# Altium PCB STM 32 F4 Robusta V1.PcbDoc (part 6 of 7)
Units mm, origin at the board's own origin, x right, y up, seen from the top; angles counter-clockwise.
Board outline 287.78 x 230 mm, 2 copper layers (Top Layer, Bottom Layer); 54 components, 96 nets, 355 pads, 16 vias.
Unrouted connection lines stored in the file: 3.
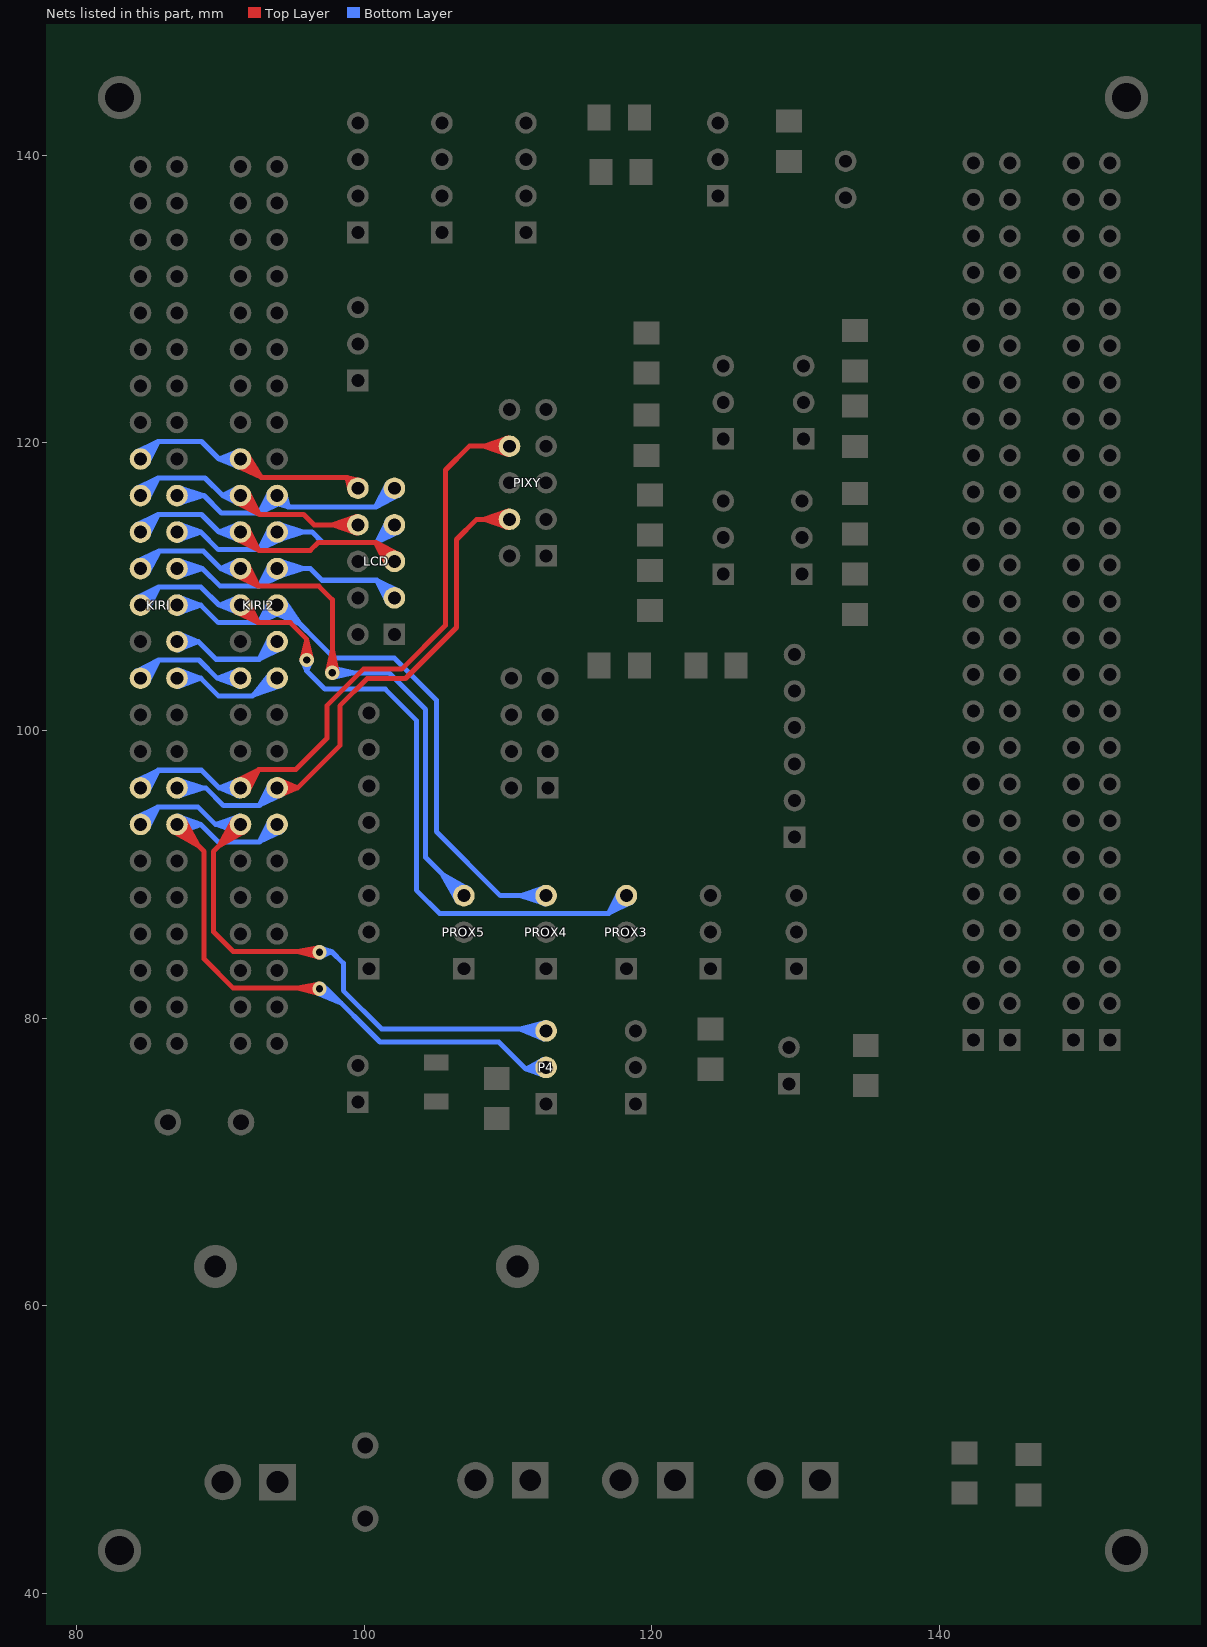
[diagram p6: the nets of this part, all layers, seen from the top]

## Via types
v1: diameter 1, hole 0.5, Top Layer to Bottom Layer, 13 vias
v2: diameter 0.8, hole 0.5, Top Layer to Bottom Layer, 3 vias

## Nets (pads, with @x,y where several pads share a name; then routed paths per layer and width w, separated by ;. In a path a pad name is that pad's centre, name@x,y a point inside that pad or via, vN(x,y) a via of type N, cw(c..) or ccw(c..) an arc to the next point about the centre after c; other vN are vias at no path point) (continued)
NetKIRI2_13: KIRI2.13 KIRI.13 P4.2 | length 150
  Top Layer w0.35: KIRI.13@86.648,93.014 88.487,91.98 ; KIRI.13@86.695,92.981 87.689,92.711 ; KIRI.13@86.742,92.956 87.756,92.778 ; KIRI.13@86.845,93.305 88.487,91.98 ; KIRI.13@86.846,93.303 87.689,92.711 ; KIRI.13@86.862,93.29 87.756,92.778 ; KIRI.13@86.995,92.897 cw(c86.995,91.509) 87.977,92.49 cw(c88.958,93.472) KIRI.13@87.57,93.472 ; KIRI.13@87.162,93.622 88.487,91.98 ; KIRI.13@87.164,93.621 87.756,92.778 ; KIRI.13@87.177,93.605 87.689,92.711 ; KIRI.13@87.453,93.819 88.487,91.98 ; KIRI.13@87.486,93.772 87.756,92.778 ; KIRI.13@87.511,93.725 87.689,92.711 ; 95.996,82.092 cw(c95.996,81.137) v1@96.671,81.812 ; 96.237,82.092 ccw(c96.237,82.706) v1@96.671,82.272 ; v1@96.756,81.751 96.396,82.113 ; v1@96.812,81.729 96.243,82.059 ; v1@96.829,82.359 96.243,82.059 ; v1@96.841,82.361 96.396,82.113 ; v1@96.857,81.72 95.349,82.092 ; v1@96.877,82.366 95.349,82.092 ; v1@96.901,82.092 90.903,82.092 88.885,84.11 88.885,91.582 KIRI.13@86.995,93.472 ; KIRI.13@86.995,93.472 87.689,92.711 ; KIRI.13@86.995,93.472 87.756,92.778 ; 95.349,82.092 v1(96.901,82.042) ; 96.243,82.059 v1(96.901,82.042) ; 96.396,82.113 v1(96.901,82.042)
  Bottom Layer w0.35: KIRI.13@87.009,93.247 88.024,93.425 ; KIRI.13@87.009,93.697 88.024,93.519 ; KIRI.13@87.01,93.248 88.646,93.472 ; KIRI.13@87.01,93.696 88.646,93.472 ; KIRI.13@87.03,93.25 88.024,93.519 ; KIRI.13@87.03,93.694 88.024,93.425 ; KIRI.13@87.095,92.906 88.646,93.472 ; KIRI.13@87.095,94.038 88.646,93.472 ; KIRI.13@87.13,92.913 88.024,93.425 ; KIRI.13@87.13,94.031 88.024,93.519 ; KIRI.13@87.181,92.928 88.024,93.519 ; KIRI.13@87.181,94.016 88.024,93.425 ; KIRI.13@87.402,93.065 cw(c88.383,92.084) 88.383,93.472 cw(c88.383,94.86) KIRI.13@87.402,93.879 ; KIRI2.13@93.375,93.477 cw(c91.987,93.477) 92.968,92.495 cw(c93.95,91.514) KIRI2.13@93.95,92.902 ; KIRI2.13@93.434,93.73 93.256,92.716 ; KIRI2.13@93.459,93.777 93.189,92.783 ; KIRI2.13@93.482,93.81 92.725,92.252 ; KIRI2.13@93.768,93.61 93.256,92.716 ; KIRI2.13@94.083,93.295 93.189,92.783 ; KIRI2.13@94.203,92.961 93.189,92.783 ; KIRI2.13@94.25,92.986 93.256,92.716 ; KIRI2.13@94.283,93.009 92.725,92.252 ; v1@96.52,82.092 96.851,82.092 v1(96.901,82.042) ; v1@96.746,81.756 98.418,81.033 ; v1@96.776,81.742 97.907,81.448 ; v1@96.901,81.717 cw(c96.901,79.706) 98.323,81.128 ; v1@96.901,82.067 cw(c96.901,80.901) 97.726,81.725 ; v1@96.919,81.717 97.484,81.911 ; v1@97.056,82.328 97.484,81.911 ; v1@97.196,81.906 cw(c97.409,81.808) 97.409,82.042 ; v1@97.196,82.178 ccw(c97.409,82.276) 97.409,82.042 ; 111.567,76.454 cw(c111.567,75.499) P4.2@112.242,76.174 ; P4.2@112.188,76.924 cw(c111.252,77.62) 111.252,76.454 ; P4.2@112.356,77.076 111.814,76.421 ; P4.2@112.454,77.122 111.714,76.55 ; P4.2@112.481,77.131 111.252,76.454 ; P4.2@112.491,76.028 111.714,76.55 ; P4.2@112.522,76.454 111.252,76.454 ; P4.2@112.559,76.013 111.814,76.421 ; P4.2@112.578,76.794 111.814,76.421 ; P4.2@112.583,76.01 111.252,76.454 ; P4.2@112.611,76.803 111.252,76.454 ; P4.2@112.614,76.803 111.714,76.55 ; P4.2@112.629,76.357 111.714,76.55 ; P4.2@112.651,76.356 111.252,76.454 ; P4.2@112.662,76.356 111.814,76.421 ; KIRI.13@86.995,93.472 88.024,93.519 ; KIRI.13@86.995,93.472 88.024,93.425 ; KIRI.13@86.995,93.472 88.646,93.472 ; 88.646,93.472 89.866,92.252 92.725,92.252 ; 92.725,92.252 KIRI2.13@93.95,93.477 ; 92.725,92.252 93.781,93.625 93.189,92.783 ; 92.725,92.252 94.098,93.308 93.256,92.716 ; 92.725,92.252 KIRI2.13@93.95,93.477 ; 93.189,92.783 KIRI2.13@93.95,93.477 ; 93.256,92.716 KIRI2.13@93.95,93.477 ; v1(96.901,82.042) 97.409,82.042 ; v1(96.901,82.042) 98.418,81.033 ; v1(96.901,82.042) 97.907,81.448 ; v1(96.901,82.042) 97.484,81.911 ; v1(96.901,82.042) 97.409,82.042 ; 97.409,82.042 97.005,81.734 97.409,82.042 ; 97.409,82.042 97.005,82.35 97.409,82.042 ; 97.409,82.042 101.107,78.344 109.362,78.344 111.252,76.454 ; 97.907,81.448 97.104,82.296 98.418,81.033 ; 111.252,76.454 P4.2@112.649,76.581 ; 111.714,76.55 P4.2@112.649,76.581 ; 111.814,76.421 P4.2@112.649,76.581
NetKIRI2_14: KIRI2.14 KIRI.14 P4.3 | length 145.7
  Top Layer w0.35: KIRI2.14@90.835,93.477 cw(c89.447,93.477) 90.428,92.495 cw(c91.41,91.514) KIRI2.14@91.41,92.902 ; KIRI2.14@90.894,93.73 90.716,92.716 ; KIRI2.14@90.919,93.777 90.649,92.783 ; KIRI2.14@90.952,93.824 89.918,91.985 ; KIRI2.14@91.228,93.61 90.716,92.716 ; KIRI2.14@91.241,93.626 90.649,92.783 ; KIRI2.14@91.243,93.627 89.918,91.985 ; KIRI2.14@91.543,93.295 90.649,92.783 ; KIRI2.14@91.559,93.308 90.716,92.716 ; KIRI2.14@91.56,93.31 89.918,91.985 ; KIRI2.14@91.663,92.961 90.649,92.783 ; KIRI2.14@91.71,92.986 90.716,92.716 ; KIRI2.14@91.757,93.019 89.918,91.985 ; 95.996,84.632 cw(c95.996,83.677) v1@96.671,84.352 ; 96.237,84.632 ccw(c96.237,85.246) v1@96.671,84.812 ; v1@96.52,84.632 90.903,84.632 89.535,86 89.535,91.602 KIRI2.14@91.41,93.477 ; v1@96.756,84.291 96.396,84.653 ; v1@96.812,84.269 96.243,84.599 ; v1@96.829,84.899 96.243,84.599 ; v1@96.841,84.901 96.396,84.653 ; v1@96.857,84.26 95.342,84.632 ; v1@96.878,84.906 95.342,84.632 ; 89.918,91.985 KIRI2.14@91.41,93.477 ; 90.649,92.783 KIRI2.14@91.41,93.477 ; 90.716,92.716 KIRI2.14@91.41,93.477 ; 95.342,84.632 v1(96.901,84.582) ; 96.243,84.599 v1(96.901,84.582) ; 96.396,84.653 v1(96.901,84.582)
  Bottom Layer w0.35: KIRI.14@84.122,93.94 85.68,94.697 ; KIRI.14@84.155,93.963 85.149,94.233 ; KIRI.14@84.202,93.988 85.216,94.166 ; KIRI.14@84.322,93.654 85.216,94.166 ; KIRI.14@84.455,94.047 ccw(c84.455,95.435) 85.437,94.454 ccw(c86.418,93.472) KIRI.14@85.03,93.472 ; KIRI.14@84.637,93.339 85.149,94.233 ; KIRI.14@84.923,93.139 85.68,94.697 ; KIRI.14@84.946,93.172 85.216,94.166 ; KIRI.14@84.971,93.219 85.149,94.233 ; KIRI2.14@91.003,93.07 ccw(c90.022,92.089) 90.022,93.477 ccw(c90.022,94.865) KIRI2.14@91.003,93.884 ; KIRI2.14@91.224,92.933 90.381,93.524 ; KIRI2.14@91.224,94.021 90.381,93.43 ; KIRI2.14@91.275,92.918 90.381,93.43 ; KIRI2.14@91.275,94.036 90.381,93.524 ; KIRI2.14@91.316,92.91 89.657,93.477 ; KIRI2.14@91.316,94.044 89.657,93.477 ; KIRI2.14@91.375,93.255 90.381,93.524 ; KIRI2.14@91.375,93.699 90.381,93.43 ; v1@96.52,84.632 97.74,84.632 ; v1@96.945,84.904 97.74,84.632 ; v1@96.961,84.901 97.406,84.653 ; v1@96.983,84.267 97.74,84.632 ; v1@96.985,84.896 97.49,84.592 ; v1@96.996,84.271 97.49,84.592 ; v1@97.046,84.291 97.406,84.653 ; v1@97.131,84.812 ccw(c97.565,85.246) 97.565,84.632 ; v1@97.143,84.365 cw(c97.74,83.831) 97.74,84.632 ; 110.954,79.248 cw(c110.954,77.426) P4.3@112.242,78.714 ; 111.567,79.248 ccw(c111.567,80.203) P4.3@112.242,79.528 ; 111.799,79.248 cw(c111.799,78.271) P4.3@112.49,78.962 ; P4.3@112.356,78.626 111.814,79.281 ; P4.3@112.485,78.57 111.426,79.186 ; P4.3@112.519,78.561 110.83,79.248 ; P4.3@112.522,78.994 112.268,79.248 101.219,79.248 98.552,81.915 98.552,83.82 97.74,84.632 ; P4.3@112.544,79.686 111.426,79.186 ; P4.3@112.559,79.689 111.814,79.281 ; P4.3@112.578,78.908 111.814,79.281 ; P4.3@112.598,79.694 110.83,79.248 ; P4.3@112.616,78.898 111.426,79.186 ; P4.3@112.62,78.898 110.83,79.248 ; P4.3@112.64,79.346 111.426,79.186 ; P4.3@112.651,79.346 110.83,79.248 ; P4.3@112.662,79.346 111.814,79.281 ; KIRI.14@84.455,93.472 85.216,94.166 ; KIRI.14@84.455,93.472 85.149,94.233 ; KIRI.14@84.455,93.472 85.68,94.697 ; 85.149,94.233 84.306,93.641 85.68,94.697 ; 85.216,94.166 84.624,93.323 85.68,94.697 ; 85.68,94.697 88.437,94.697 89.657,93.477 ; 89.657,93.477 KIRI2.14@91.41,93.477 ; 89.657,93.477 91.396,93.702 90.381,93.524 ; 89.657,93.477 91.396,93.252 90.381,93.43 ; 89.657,93.477 KIRI2.14@91.41,93.477 ; 90.381,93.43 KIRI2.14@91.41,93.477 ; 90.381,93.524 KIRI2.14@91.41,93.477 ; v1(96.901,84.582) 97.406,84.653 ; v1(96.901,84.582) 97.49,84.592 ; v1(96.901,84.582) 97.74,84.632 ; 110.83,79.248 P4.3@112.649,79.121 ; 111.426,79.186 P4.3@112.649,79.121 ; 111.814,79.281 P4.3@112.649,79.121
NetKIRI2_15: KIRI2.15 KIRI.15 PIXY.7 | length 115.8
  Top Layer w0.35: KIRI2.15@93.964,95.792 94.979,95.97 ; KIRI2.15@93.964,96.242 94.979,96.064 ; KIRI2.15@93.968,95.793 95.382,96.017 ; KIRI2.15@93.968,96.241 95.382,96.017 ; KIRI2.15@93.985,95.795 94.979,96.064 ; KIRI2.15@93.985,96.239 94.979,95.97 ; KIRI2.15@94.065,95.454 95.382,96.017 ; KIRI2.15@94.065,96.58 95.382,96.017 ; KIRI2.15@94.085,95.458 94.979,95.97 ; KIRI2.15@94.085,96.576 94.979,96.064 ; KIRI2.15@94.136,95.473 94.979,96.064 ; KIRI2.15@94.136,96.561 94.979,95.97 ; KIRI2.15@94.357,95.61 cw(c95.338,94.629) 95.338,96.017 cw(c95.338,97.405) KIRI2.15@94.357,96.424 ; PIXY.7@109.702,114.274 ccw(c108.721,113.293) 108.721,114.681 ccw(c108.721,116.069) PIXY.7@109.702,115.088 ; PIXY.7@109.923,114.137 109.08,114.728 ; PIXY.7@109.923,115.225 109.08,114.634 ; PIXY.7@109.974,114.122 109.08,114.634 ; PIXY.7@109.974,115.24 109.08,114.728 ; PIXY.7@110.017,114.113 108.309,114.681 ; PIXY.7@110.017,115.249 108.309,114.681 ; PIXY.7@110.074,114.459 109.08,114.728 ; PIXY.7@110.074,114.903 109.08,114.634 ; KIRI2.15@93.95,96.017 94.979,95.97 ; KIRI2.15@93.95,96.017 94.979,96.064 ; KIRI2.15@93.95,96.017 95.382,96.017 ; 95.382,96.017 98.313,98.948 98.313,101.712 100.218,103.617 102.885,103.617 106.426,107.158 106.426,113.284 107.823,114.681 PIXY.7@110.109,114.681 ; 108.309,114.681 110.095,114.906 109.08,114.728 ; 108.309,114.681 110.095,114.456 109.08,114.634 ; 109.08,114.634 PIXY.7@110.109,114.681 ; 109.08,114.728 PIXY.7@110.109,114.681
  Bottom Layer w0.35: KIRI.15@87.03,95.79 88.024,96.059 ; KIRI.15@87.03,96.234 88.024,95.965 ; KIRI.15@87.087,95.444 88.795,96.012 ; KIRI.15@87.087,96.58 88.795,96.012 ; KIRI.15@87.13,95.453 88.024,95.965 ; KIRI.15@87.13,96.571 88.024,96.059 ; KIRI.15@87.181,95.468 88.024,96.059 ; KIRI.15@87.181,96.556 88.024,95.965 ; KIRI.15@87.402,95.605 cw(c88.383,94.624) 88.383,96.012 cw(c88.383,97.4) KIRI.15@87.402,96.419 ; KIRI2.15@93.375,96.017 cw(c91.987,96.017) 92.968,95.035 cw(c93.95,94.054) KIRI2.15@93.95,95.442 ; KIRI2.15@93.434,96.27 93.256,95.256 ; KIRI2.15@93.459,96.317 93.189,95.323 ; KIRI2.15@93.482,96.35 92.725,94.792 ; KIRI2.15@93.768,96.15 93.256,95.256 ; KIRI2.15@94.083,95.835 93.189,95.323 ; KIRI2.15@94.203,95.501 93.189,95.323 ; KIRI2.15@94.25,95.526 93.256,95.256 ; KIRI2.15@94.283,95.549 92.725,94.792 ; KIRI.15@86.995,96.012 88.024,95.965 ; KIRI.15@86.995,96.012 88.024,96.059 ; KIRI.15@86.995,96.012 88.997,96.012 90.217,94.792 92.725,94.792 ; 88.024,95.965 87.009,95.787 88.795,96.012 ; 88.024,96.059 87.009,96.237 88.795,96.012 ; 92.725,94.792 KIRI2.15@93.95,96.017 ; 92.725,94.792 93.781,96.165 93.189,95.323 ; 92.725,94.792 94.098,95.848 93.256,95.256 ; 92.725,94.792 KIRI2.15@93.95,96.017 ; 93.189,95.323 KIRI2.15@93.95,96.017 ; 93.256,95.256 KIRI2.15@93.95,96.017
NetKIRI2_16: KIRI2.16 KIRI.16 PIXY.3 | length 122.9
  Top Layer w0.35: KIRI2.16@91.074,96.484 92.675,97.282 ; KIRI2.16@91.11,96.508 92.104,96.778 ; KIRI2.16@91.156,96.533 92.171,96.711 ; KIRI2.16@91.277,96.199 92.171,96.711 ; KIRI2.16@91.41,96.592 ccw(c91.41,97.98) 92.392,96.999 ccw(c93.373,96.017) KIRI2.16@91.985,96.017 ; KIRI2.16@91.592,95.884 92.104,96.778 ; KIRI2.16@91.877,95.681 92.675,97.282 ; KIRI2.16@91.901,95.717 92.171,96.711 ; KIRI2.16@91.926,95.763 92.104,96.778 ; PIXY.3@109.702,119.354 ccw(c108.721,118.373) 108.721,119.761 ccw(c108.721,121.149) PIXY.3@109.702,120.168 ; PIXY.3@109.923,119.217 109.08,119.808 ; PIXY.3@109.923,120.305 109.08,119.714 ; PIXY.3@109.974,119.202 109.08,119.714 ; PIXY.3@109.974,120.32 109.08,119.808 ; PIXY.3@110.017,119.193 108.309,119.761 ; PIXY.3@110.017,120.329 108.309,119.761 ; PIXY.3@110.074,119.539 109.08,119.808 ; PIXY.3@110.074,119.983 109.08,119.714 ; KIRI2.16@91.41,96.017 92.104,96.778 ; KIRI2.16@91.41,96.017 92.171,96.711 ; KIRI2.16@91.41,96.017 92.675,97.282 ; 92.104,96.778 91.261,96.186 92.675,97.282 ; 92.171,96.711 91.579,95.868 92.675,97.282 ; 92.675,97.282 95.25,97.282 97.409,99.441 97.409,101.727 99.949,104.267 102.616,104.267 105.664,107.315 105.664,118.11 107.315,119.761 PIXY.3@110.109,119.761 ; 108.309,119.761 110.095,119.986 109.08,119.808 ; 108.309,119.761 110.095,119.536 109.08,119.714 ; 109.08,119.714 PIXY.3@110.109,119.761 ; 109.08,119.808 PIXY.3@110.109,119.761
  Bottom Layer w0.35: KIRI.16@84.122,96.48 85.68,97.237 ; KIRI.16@84.155,96.503 85.149,96.773 ; KIRI.16@84.202,96.528 85.216,96.706 ; KIRI.16@84.322,96.194 85.216,96.706 ; KIRI.16@84.455,96.587 ccw(c84.455,97.975) 85.437,96.994 ccw(c86.418,96.012) KIRI.16@85.03,96.012 ; KIRI.16@84.637,95.879 85.149,96.773 ; KIRI.16@84.923,95.679 85.68,97.237 ; KIRI.16@84.946,95.712 85.216,96.706 ; KIRI.16@84.971,95.759 85.149,96.773 ; KIRI2.16@91.003,95.61 ccw(c90.022,94.629) 90.022,96.017 ccw(c90.022,97.405) KIRI2.16@91.003,96.424 ; KIRI2.16@91.224,95.473 90.381,96.064 ; KIRI2.16@91.224,96.561 90.381,95.97 ; KIRI2.16@91.275,95.458 90.381,95.97 ; KIRI2.16@91.275,96.576 90.381,96.064 ; KIRI2.16@91.3,95.453 89.911,96.017 ; KIRI2.16@91.3,96.581 89.911,96.017 ; KIRI2.16@91.375,95.795 90.381,96.064 ; KIRI2.16@91.375,96.239 90.381,95.97 ; KIRI2.16@91.393,95.793 89.911,96.017 ; KIRI2.16@91.393,96.241 89.911,96.017 ; KIRI2.16@91.396,95.792 90.381,95.97 ; KIRI2.16@91.396,96.242 90.381,96.064 ; KIRI.16@84.455,96.012 85.149,96.773 ; KIRI.16@84.455,96.012 85.216,96.706 ; KIRI.16@84.455,96.012 85.68,97.237 ; 85.149,96.773 84.306,96.181 85.68,97.237 ; 85.216,96.706 84.624,95.863 85.68,97.237 ; 85.68,97.237 88.691,97.237 89.911,96.017 ; 89.911,96.017 KIRI2.16@91.41,96.017 ; 89.911,96.017 KIRI2.16@91.41,96.017 ; 90.381,95.97 KIRI2.16@91.41,96.017 ; 90.381,96.064 KIRI2.16@91.41,96.017
NetKIRI2_21: KIRI2.21 KIRI.21 | length 51.6
  Bottom Layer w0.35: KIRI.21@87.009,103.407 88.024,103.585 ; KIRI.21@87.009,103.857 88.024,103.679 ; KIRI.21@87.01,103.408 88.646,103.632 ; KIRI.21@87.01,103.856 88.646,103.632 ; KIRI.21@87.03,103.41 88.024,103.679 ; KIRI.21@87.03,103.854 88.024,103.585 ; KIRI.21@87.095,103.066 88.646,103.632 ; KIRI.21@87.095,104.198 88.646,103.632 ; KIRI.21@87.13,103.073 88.024,103.585 ; KIRI.21@87.13,104.191 88.024,103.679 ; KIRI.21@87.181,103.088 88.024,103.679 ; KIRI.21@87.181,104.176 88.024,103.585 ; KIRI.21@87.402,103.225 cw(c88.383,102.244) 88.383,103.632 cw(c88.383,105.02) KIRI.21@87.402,104.039 ; 92.814,102.974 cw(c93.875,101.914) KIRI2.21@93.94,103.412 ; KIRI2.21@93.527,104.027 92.799,102.813 ; KIRI2.21@93.532,104.032 93.182,103.244 ; KIRI2.21@93.553,104.053 92.305,102.465 ; KIRI2.21@93.805,103.809 92.799,102.813 ; KIRI2.21@93.809,103.813 92.305,102.465 ; KIRI2.21@93.822,103.822 93.182,103.244 ; KIRI2.21@93.925,103.063 ccw(c93.828,100.837) 92.252,102.412 ; KIRI2.21@94.026,103.067 93.182,103.244 ; KIRI2.21@94.025,103.425 93.182,103.244 ; KIRI2.21@94.066,103.444 92.799,102.813 ; KIRI2.21@94.07,103.447 92.305,102.465 ; KIRI2.21@94.183,103.111 92.799,102.813 ; KIRI2.21@94.214,103.126 92.305,102.465 ; KIRI.21@86.995,103.632 88.024,103.679 ; KIRI.21@86.995,103.632 88.024,103.585 ; KIRI.21@86.995,103.632 88.646,103.632 ; 88.646,103.632 89.866,102.412 92.252,102.412 ; 92.252,102.412 93.477,103.637 KIRI2.21@93.95,103.637 ; 92.305,102.465 KIRI2.21@93.95,103.637 ; 92.799,102.813 KIRI2.21@93.95,103.637 ; 93.182,103.244 KIRI2.21@93.95,103.637
NetKIRI2_22: KIRI2.22 KIRI.22 | length 48.3
  Bottom Layer w0.35: KIRI.22@84.119,104.098 85.725,104.902 ; KIRI.22@84.155,104.123 85.149,104.393 ; KIRI.22@84.202,104.148 85.216,104.326 ; KIRI.22@84.322,103.814 85.216,104.326 ; KIRI.22@84.455,104.207 ccw(c84.455,105.595) 85.437,104.614 ccw(c86.418,103.632) KIRI.22@85.03,103.632 ; KIRI.22@84.637,103.499 85.149,104.393 ; KIRI.22@84.921,103.296 85.725,104.902 ; KIRI.22@84.946,103.332 85.216,104.326 ; KIRI.22@84.971,103.379 85.149,104.393 ; KIRI2.22@91.003,103.23 ccw(c90.022,102.249) 90.022,103.637 ccw(c90.022,105.025) KIRI2.22@91.003,104.044 ; KIRI2.22@91.224,103.093 90.381,103.684 ; KIRI2.22@91.224,104.181 90.381,103.59 ; KIRI2.22@91.275,103.078 90.381,103.59 ; KIRI2.22@91.275,104.196 90.381,103.684 ; KIRI2.22@91.308,103.071 89.784,103.637 ; KIRI2.22@91.308,104.203 89.784,103.637 ; KIRI2.22@91.375,103.415 90.381,103.684 ; KIRI2.22@91.375,103.859 90.381,103.59 ; KIRI2.22@91.394,103.413 89.784,103.637 ; KIRI2.22@91.394,103.861 89.784,103.637 ; KIRI2.22@91.396,103.412 90.381,103.59 ; KIRI2.22@91.396,103.862 90.381,103.684 ; KIRI.22@84.455,103.632 85.216,104.326 ; KIRI.22@84.455,103.632 85.149,104.393 ; KIRI.22@84.455,103.632 85.725,104.902 ; 85.149,104.393 84.306,103.801 85.725,104.902 ; 85.216,104.326 84.624,103.483 85.725,104.902 ; 85.725,104.902 88.519,104.902 89.784,103.637 ; 89.784,103.637 KIRI2.22@91.41,103.637 ; 89.784,103.637 KIRI2.22@91.41,103.637 ; 90.381,103.59 KIRI2.22@91.41,103.637 ; 90.381,103.684 KIRI2.22@91.41,103.637
NetKIRI2_23: KIRI2.23 KIRI.23 | length 47.6
  Bottom Layer w0.35: KIRI.23@87.009,105.947 88.024,106.125 ; KIRI.23@87.009,106.397 88.024,106.219 ; KIRI.23@87.012,105.948 88.489,106.172 ; KIRI.23@87.012,106.396 88.489,106.172 ; KIRI.23@87.03,105.95 88.024,106.219 ; KIRI.23@87.03,106.394 88.024,106.125 ; KIRI.23@87.106,105.608 88.489,106.172 ; KIRI.23@87.106,106.736 88.489,106.172 ; KIRI.23@87.13,105.613 88.024,106.125 ; KIRI.23@87.13,106.731 88.024,106.219 ; KIRI.23@87.181,105.628 88.024,106.219 ; KIRI.23@87.181,106.716 88.024,106.125 ; KIRI.23@87.402,105.765 cw(c88.383,104.784) 88.383,106.172 cw(c88.383,107.56) KIRI.23@87.402,106.579 ; KIRI2.23@93.375,106.177 cw(c91.987,106.177) 92.968,105.195 cw(c93.95,104.214) KIRI2.23@93.95,105.602 ; KIRI2.23@93.434,106.43 93.256,105.416 ; KIRI2.23@93.459,106.477 93.189,105.483 ; KIRI2.23@93.482,106.51 92.725,104.952 ; KIRI2.23@93.768,106.31 93.256,105.416 ; KIRI2.23@94.083,105.995 93.189,105.483 ; KIRI2.23@94.203,105.661 93.189,105.483 ; KIRI2.23@94.25,105.686 93.256,105.416 ; KIRI2.23@94.283,105.709 92.725,104.952 ; KIRI.23@86.995,106.172 88.024,106.125 ; KIRI.23@86.995,106.172 88.024,106.219 ; KIRI.23@86.995,106.172 88.489,106.172 ; 88.489,106.172 89.709,104.952 92.725,104.952 ; 92.725,104.952 KIRI2.23@93.95,106.177 ; 92.725,104.952 93.781,106.325 93.189,105.483 ; 92.725,104.952 94.098,106.008 93.256,105.416 ; 92.725,104.952 KIRI2.23@93.95,106.177 ; 93.189,105.483 KIRI2.23@93.95,106.177 ; 93.256,105.416 KIRI2.23@93.95,106.177
NetKIRI2_25: KIRI2.25 KIRI.25 PROX4.3 | length 120.6
  Bottom Layer w0.35: KIRI.25@87.009,108.487 88.024,108.665 ; KIRI.25@87.009,108.937 88.024,108.759 ; KIRI.25@87.01,108.488 88.646,108.712 ; KIRI.25@87.01,108.936 88.646,108.712 ; KIRI.25@87.03,108.49 88.024,108.759 ; KIRI.25@87.03,108.934 88.024,108.665 ; KIRI.25@87.095,108.146 88.646,108.712 ; KIRI.25@87.095,109.278 88.646,108.712 ; KIRI.25@87.13,108.153 88.024,108.665 ; KIRI.25@87.13,109.271 88.024,108.759 ; KIRI.25@87.181,108.168 88.024,108.759 ; KIRI.25@87.181,109.256 88.024,108.665 ; KIRI.25@87.402,108.305 cw(c88.383,107.324) 88.383,108.712 cw(c88.383,110.1) KIRI.25@87.402,109.119 ; KIRI2.25@93.375,108.717 cw(c91.987,108.717) 92.968,107.735 cw(c93.95,106.754) 93.95,108.142 cw(c93.95,106.08) 95.408,107.538 ; KIRI2.25@93.434,108.97 93.256,107.956 ; KIRI2.25@93.459,109.017 93.189,108.023 ; KIRI2.25@93.482,109.05 92.725,107.492 ; KIRI2.25@93.648,108.228 95.566,107.38 ; KIRI2.25@93.688,108.205 94.981,107.866 ; KIRI2.25@93.768,108.85 93.256,107.956 ; KIRI2.25@93.816,108.536 95.566,107.38 ; KIRI2.25@93.822,108.532 94.981,107.866 ; KIRI2.25@93.95,108.492 cw(c93.95,107.275) 94.81,108.136 ; KIRI2.25@94.083,108.535 93.189,108.023 ; KIRI2.25@94.102,108.882 95.566,107.38 ; KIRI2.25@94.107,108.878 94.981,107.866 ; KIRI2.25@94.203,108.201 93.189,108.023 ; KIRI2.25@94.25,108.226 93.256,107.956 ; KIRI2.25@94.283,108.249 92.725,107.492 ; KIRI2.25@94.374,109.106 95.566,107.38 ; KIRI2.25@94.403,109.071 94.981,107.866 ; KIRI2.25@94.525,108.717 ccw(c95.239,108.717) 94.734,108.212 ; PROX4.3@112.242,88.112 ccw(c111.261,87.131) 111.261,88.519 ccw(c111.261,89.907) PROX4.3@112.242,88.926 ; PROX4.3@112.463,87.975 111.62,88.566 ; PROX4.3@112.463,89.063 111.62,88.472 ; PROX4.3@112.514,87.96 111.62,88.472 ; PROX4.3@112.514,89.078 111.62,88.566 ; PROX4.3@112.557,87.951 110.849,88.519 ; PROX4.3@112.557,89.087 110.849,88.519 ; PROX4.3@112.614,88.297 111.62,88.566 ; PROX4.3@112.614,88.741 111.62,88.472 ; KIRI.25@86.995,108.712 88.024,108.759 ; KIRI.25@86.995,108.712 88.024,108.665 ; KIRI.25@86.995,108.712 88.646,108.712 ; 88.646,108.712 89.866,107.492 92.725,107.492 ; 92.725,107.492 KIRI2.25@93.95,108.717 ; 92.725,107.492 93.781,108.865 93.189,108.023 ; 92.725,107.492 94.098,108.548 93.256,107.956 ; 92.725,107.492 KIRI2.25@93.95,108.717 ; 93.189,108.023 KIRI2.25@93.95,108.717 ; 93.256,107.956 KIRI2.25@93.95,108.717 ; KIRI2.25@93.95,108.717 95.566,107.38 ; KIRI2.25@93.95,108.717 94.981,107.866 ; KIRI2.25@93.95,108.717 94.229,108.717 97.917,105.029 102.108,105.029 105.029,102.108 105.029,92.964 109.474,88.519 PROX4.3@112.649,88.519 ; 110.849,88.519 112.635,88.744 111.62,88.566 ; 110.849,88.519 112.635,88.294 111.62,88.472 ; 111.62,88.472 PROX4.3@112.649,88.519 ; 111.62,88.566 PROX4.3@112.649,88.519
NetKIRI2_26: KIRI2.26 KIRI.26 PROX3.3 | length 147
  Top Layer w0.35: KIRI2.26@91.077,108.249 92.635,107.492 ; KIRI2.26@91.11,108.226 92.104,107.956 ; KIRI2.26@91.156,108.201 92.171,108.023 ; KIRI2.26@91.277,108.535 92.171,108.023 ; KIRI2.26@91.41,108.142 cw(c91.41,106.754) 92.392,107.735 cw(c93.373,108.717) KIRI2.26@91.985,108.717 ; KIRI2.26@91.579,108.866 92.171,108.023 ; KIRI2.26@91.579,108.865 92.635,107.492 ; KIRI2.26@91.592,108.85 92.104,107.956 ; KIRI2.26@91.878,109.05 92.635,107.492 ; KIRI2.26@91.901,109.017 92.171,108.023 ; KIRI2.26@91.926,108.97 92.104,107.956 ; v1@95.689,104.939 96.012,106.345 ; v1@95.696,104.978 95.985,105.484 ; v1@95.704,105.007 96.039,105.484 ; v1@95.782,105.132 ccw(c95.227,105.687) 96.012,105.687 ccw(c96.797,105.687) v1@96.242,105.132 ; v1@96.32,105.007 95.985,105.484 ; v1@96.328,104.978 96.039,105.484 ; v1@96.335,104.939 96.012,106.345 ; KIRI2.26@91.41,108.717 92.104,107.956 ; KIRI2.26@91.41,108.717 92.171,108.023 ; KIRI2.26@91.41,108.717 92.635,107.492 ; 92.104,107.956 91.261,108.548 92.635,107.492 ; 92.635,107.492 94.865,107.492 96.012,106.345 ; 95.985,105.484 v1(96.012,104.902) ; v1(96.012,104.902) 96.039,105.484 ; v1(96.012,104.902) 96.012,106.345
  Bottom Layer w0.35: KIRI.26@84.119,109.178 85.725,109.982 ; KIRI.26@84.155,109.203 85.149,109.473 ; KIRI.26@84.202,109.228 85.216,109.406 ; KIRI.26@84.322,108.894 85.216,109.406 ; KIRI.26@84.455,109.287 ccw(c84.455,110.675) 85.437,109.694 ccw(c86.418,108.712) KIRI.26@85.03,108.712 ; KIRI.26@84.637,108.579 85.149,109.473 ; KIRI.26@84.921,108.376 85.725,109.982 ; KIRI.26@84.946,108.412 85.216,109.406 ; KIRI.26@84.971,108.459 85.149,109.473 ; KIRI2.26@91.003,108.31 ccw(c90.022,107.329) 90.022,108.717 ccw(c90.022,110.105) KIRI2.26@91.003,109.124 ; KIRI2.26@91.224,108.173 90.381,108.764 ; KIRI2.26@91.224,109.261 90.381,108.67 ; KIRI2.26@91.275,108.158 90.381,108.67 ; KIRI2.26@91.275,109.276 90.381,108.764 ; KIRI2.26@91.3,108.153 89.911,108.717 ; KIRI2.26@91.3,109.281 89.911,108.717 ; KIRI2.26@91.375,108.495 90.381,108.764 ; KIRI2.26@91.375,108.939 90.381,108.67 ; KIRI2.26@91.393,108.493 89.911,108.717 ; KIRI2.26@91.393,108.941 89.911,108.717 ; KIRI2.26@91.396,108.492 90.381,108.67 ; KIRI2.26@91.396,108.942 90.381,108.764 ; v1@95.694,104.833 96.012,104.14 ; v1@95.697,104.824 95.983,104.344 ; v1@95.706,104.791 96.041,104.344 ; v1@95.787,104.667 cw(c95.281,104.14) 96.012,104.14 ; v1@96.237,104.667 ccw(c96.743,104.14) 96.012,104.14 ; v1@96.318,104.791 95.983,104.344 ; v1@96.327,104.824 96.041,104.344 ; v1@96.33,104.833 96.012,104.14 ; PROX3.3@117.662,88.519 cw(c116.274,88.519) 117.255,87.537 cw(c118.237,86.556) PROX3.3@118.237,87.944 ; PROX3.3@117.721,88.772 117.543,87.758 ; PROX3.3@117.746,88.819 117.476,87.825 ; PROX3.3@117.769,88.852 117.012,87.294 ; PROX3.3@118.055,88.652 117.543,87.758 ; PROX3.3@118.37,88.337 117.476,87.825 ; PROX3.3@118.49,88.003 117.476,87.825 ; PROX3.3@118.537,88.028 117.543,87.758 ; PROX3.3@118.57,88.051 117.012,87.294 ; KIRI.26@84.455,108.712 85.149,109.473 ; KIRI.26@84.455,108.712 85.216,109.406 ; KIRI.26@84.455,108.712 85.725,109.982 ; 85.149,109.473 84.306,108.881 85.725,109.982 ; 85.216,109.406 84.624,108.563 85.725,109.982 ; 85.725,109.982 88.646,109.982 89.911,108.717 ; 89.911,108.717 KIRI2.26@91.41,108.717 ; 89.911,108.717 KIRI2.26@91.41,108.717 ; 90.381,108.67 KIRI2.26@91.41,108.717 ; 90.381,108.764 KIRI2.26@91.41,108.717 ; 95.983,104.344 v1(96.012,104.902) ; 96.012,104.14 v1(96.012,104.902) ; 96.012,104.14 v1(96.012,104.902) ; 96.012,104.14 97.282,102.87 101.473,102.87 103.632,100.711 103.632,88.9 105.238,87.294 117.012,87.294 ; v1(96.012,104.902) 96.041,104.344 ; 117.012,87.294 PROX3.3@118.237,88.519 ; 117.012,87.294 118.068,88.667 117.476,87.825 ; 117.012,87.294 118.385,88.35 117.543,87.758 ; 117.012,87.294 PROX3.3@118.237,88.519 ; 117.476,87.825 PROX3.3@118.237,88.519 ; 117.543,87.758 PROX3.3@118.237,88.519
NetKIRI2_27: KIRI2.27 KIRI.27 LCD.3 | length 98.5
  Bottom Layer w0.35: KIRI.27@87.03,111.03 88.024,111.299 ; KIRI.27@87.03,111.474 88.024,111.205 ; KIRI.27@87.088,110.685 88.773,111.252 ; KIRI.27@87.088,111.819 88.773,111.252 ; KIRI.27@87.13,110.693 88.024,111.205 ; KIRI.27@87.13,111.811 88.024,111.299 ; KIRI.27@87.181,110.708 88.024,111.299 ; KIRI.27@87.181,111.796 88.024,111.205 ; KIRI.27@87.402,110.845 cw(c88.383,109.864) 88.383,111.252 cw(c88.383,112.64) KIRI.27@87.402,111.659 ; KIRI2.27@93.375,111.257 cw(c91.987,111.257) 92.968,110.275 cw(c93.95,109.294) KIRI2.27@93.95,110.682 ; KIRI2.27@93.434,111.51 93.256,110.496 ; KIRI2.27@93.459,111.557 93.189,110.563 ; KIRI2.27@93.482,111.59 92.725,110.032 ; KIRI2.27@93.768,111.39 93.256,110.496 ; KIRI2.27@93.964,111.032 95.75,111.257 ; KIRI2.27@93.964,111.482 95.75,111.257 ; KIRI2.27@93.964,111.032 94.979,111.21 ; KIRI2.27@93.964,111.482 94.979,111.304 ; KIRI2.27@93.985,111.035 94.979,111.304 ; KIRI2.27@93.985,111.479 94.979,111.21 ; KIRI2.27@94.042,110.689 95.75,111.257 ; KIRI2.27@94.042,111.825 95.75,111.257 ; KIRI2.27@94.083,111.075 93.189,110.563 ; KIRI2.27@94.085,110.698 94.979,111.21 ; KIRI2.27@94.085,111.816 94.979,111.304 ; KIRI2.27@94.136,110.713 94.979,111.304 ; KIRI2.27@94.136,111.801 94.979,111.21 ; KIRI2.27@94.203,110.741 93.189,110.563 ; KIRI2.27@94.25,110.766 93.256,110.496 ; KIRI2.27@94.283,110.789 92.725,110.032 ; KIRI2.27@94.357,110.85 cw(c95.338,109.869) 95.338,111.257 cw(c95.338,112.645) KIRI2.27@94.357,111.664 ; LCD.3@101.533,109.22 ccw(c100.145,109.22) 101.126,110.202 ccw(c102.108,111.183) LCD.3@102.108,109.795 ; LCD.3@101.592,108.967 101.414,109.981 ; LCD.3@101.617,108.92 101.347,109.914 ; LCD.3@101.64,108.887 100.883,110.445 ; LCD.3@101.926,109.087 101.414,109.981 ; LCD.3@102.241,109.402 101.347,109.914 ; LCD.3@102.361,109.736 101.347,109.914 ; LCD.3@102.408,109.711 101.414,109.981 ; LCD.3@102.441,109.688 100.883,110.445 ; KIRI.27@86.995,111.252 88.024,111.299 ; KIRI.27@86.995,111.252 88.024,111.205 ; KIRI.27@86.995,111.252 88.773,111.252 ; 88.024,111.205 87.009,111.027 88.773,111.252 ; 88.024,111.299 87.009,111.477 88.773,111.252 ; 88.773,111.252 89.993,110.032 92.725,110.032 ; 92.725,110.032 KIRI2.27@93.95,111.257 ; 92.725,110.032 93.781,111.405 93.189,110.563 ; 92.725,110.032 94.098,111.088 93.256,110.496 ; 92.725,110.032 KIRI2.27@93.95,111.257 ; 93.189,110.563 KIRI2.27@93.95,111.257 ; 93.256,110.496 KIRI2.27@93.95,111.257 ; KIRI2.27@93.95,111.257 94.979,111.304 ; KIRI2.27@93.95,111.257 94.979,111.21 ; KIRI2.27@93.95,111.257 96.261,111.257 97.073,110.445 100.883,110.445 ; 100.883,110.445 LCD.3@102.108,109.22 ; 100.883,110.445 102.256,109.389 101.414,109.981 ; 100.883,110.445 101.939,109.072 101.347,109.914 ; 100.883,110.445 LCD.3@102.108,109.22 ; 101.347,109.914 LCD.3@102.108,109.22 ; 101.414,109.981 LCD.3@102.108,109.22
NetKIRI2_28: KIRI2.28 KIRI.28 PROX5.3 | length 135.9
  Top Layer w0.35: KIRI2.28@91.077,110.789 92.635,110.032 ; KIRI2.28@91.11,110.766 92.104,110.496 ; KIRI2.28@91.156,110.741 92.171,110.563 ; KIRI2.28@91.277,111.075 92.171,110.563 ; KIRI2.28@91.41,110.682 cw(c91.41,109.294) 92.392,110.275 cw(c93.373,111.257) KIRI2.28@91.985,111.257 ; KIRI2.28@91.579,111.406 92.171,110.563 ; KIRI2.28@91.579,111.405 92.635,110.032 ; KIRI2.28@91.592,111.39 92.104,110.496 ; KIRI2.28@91.878,111.59 92.635,110.032 ; KIRI2.28@91.901,111.557 92.171,110.563 ; KIRI2.28@91.926,111.51 92.104,110.496 ; v1@97.467,104.047 97.79,105.563 v1@98.113,104.047 ; v1@97.474,104.089 97.763,104.595 ; v1@97.482,104.118 97.817,104.595 ; v1@97.56,104.243 ccw(c97.005,104.798) 97.79,104.798 ccw(c98.575,104.798) v1@98.02,104.243 ; v1@98.098,104.118 97.763,104.595 ; v1@98.106,104.089 97.817,104.595 ; KIRI2.28@91.41,111.257 92.104,110.496 ; KIRI2.28@91.41,111.257 92.171,110.563 ; KIRI2.28@91.41,111.257 92.635,110.032 ; 92.104,110.496 91.261,111.088 92.635,110.032 ; 92.635,110.032 96.851,110.032 97.79,109.093 v1(97.79,104.013) ; 97.763,104.595 v1(97.79,104.013) ; v1(97.79,104.013) 97.817,104.595
  Bottom Layer w0.35: KIRI.28@84.135,111.73 85.77,112.477 ; KIRI.28@84.17,111.751 85.258,112.042 ; KIRI.28@84.312,111.426 85.77,112.477 ; KIRI.28@84.314,111.427 85.258,112.042 ; KIRI.28@84.455,111.827 ccw(c84.455,113.432) 85.59,112.297 ; KIRI.28@84.618,111.097 85.77,112.477 ; KIRI.28@84.628,111.108 85.258,112.042 ; KIRI.28@84.909,110.899 85.77,112.477 ; KIRI.28@84.95,110.959 85.258,112.042 ; KIRI.28@85.03,111.252 cw(c86.201,111.252) 85.373,112.08 ; KIRI2.28@91,110.854 ccw(c90.038,109.908) 90.038,111.257 ; KIRI2.28@91,111.66 cw(c90.038,112.606) 90.038,111.257 ; KIRI2.28@91.22,110.714 90.398,111.306 ; KIRI2.28@91.22,111.8 90.398,111.208 ; KIRI2.28@91.274,110.698 90.398,111.208 ; KIRI2.28@91.274,111.816 90.398,111.306 ; KIRI2.28@91.289,110.695 90.038,111.257 ; KIRI2.28@91.289,111.819 90.038,111.257 ; KIRI2.28@91.374,111.035 90.398,111.306 ; KIRI2.28@91.374,111.479 90.398,111.208 ; KIRI2.28@91.392,111.033 90.038,111.257 ; KIRI2.28@91.392,111.481 90.038,111.257 ; KIRI2.28@91.396,111.032 90.398,111.208 ; KIRI2.28@91.396,111.482 90.398,111.306 ; v1@97.824,103.69 99.34,104.013 v1@97.824,104.336 ; v1@97.866,103.697 98.372,103.986 ; v1@97.866,104.329 98.372,104.04 ; v1@97.895,103.705 98.372,104.04 ; v1@97.895,104.321 98.372,103.986 ; v1@98.02,103.783 cw(c98.575,103.228) 98.575,104.013 cw(c98.575,104.798) v1@98.02,104.243 ; PROX5.3@106.359,88.519 ccw(c104.971,88.519) 105.952,89.501 ccw(c106.934,90.482) PROX5.3@106.934,89.094 ; PROX5.3@106.418,88.266 106.24,89.28 ; PROX5.3@106.443,88.219 106.173,89.213 ; PROX5.3@106.476,88.172 105.442,90.011 ; PROX5.3@106.752,88.386 106.24,89.28 ; PROX5.3@106.765,88.37 106.173,89.213 ; PROX5.3@106.767,88.369 105.442,90.011 ; PROX5.3@107.067,88.701 106.173,89.213 ; PROX5.3@107.083,88.688 106.24,89.28 ; PROX5.3@107.084,88.686 105.442,90.011 ; PROX5.3@107.187,89.035 106.173,89.213 ; PROX5.3@107.234,89.01 106.24,89.28 ; PROX5.3@107.281,88.977 105.442,90.011 ; KIRI.28@84.455,111.252 85.258,112.042 ; KIRI.28@84.455,111.252 85.77,112.477 ; KIRI.28@84.455,111.252 84.545,111.252 85.77,112.477 ; 85.77,112.477 88.818,112.477 90.038,111.257 ; 90.038,111.257 KIRI2.28@91.41,111.257 ; 90.038,111.257 KIRI2.28@91.41,111.257 ; 90.398,111.208 KIRI2.28@91.41,111.257 ; 90.398,111.306 KIRI2.28@91.41,111.257 ; v1(97.79,104.013) 98.372,103.986 ; v1(97.79,104.013) 98.372,104.04 ; v1(97.79,104.013) 101.727,104.013 104.282,101.458 104.282,91.171 PROX5.3@106.934,88.519 ; 105.442,90.011 PROX5.3@106.934,88.519 ; 106.173,89.213 PROX5.3@106.934,88.519 ; 106.24,89.28 PROX5.3@106.934,88.519
NetKIRI2_29: KIRI2.29 KIRI.29 LCD.7 | length 98
  Bottom Layer w0.35: KIRI.29@87.009,113.567 88.024,113.745 ; KIRI.29@87.009,114.017 88.024,113.839 ; KIRI.29@87.01,113.568 88.646,113.792 ; KIRI.29@87.01,114.016 88.646,113.792 ; KIRI.29@87.03,113.57 88.024,113.839 ; KIRI.29@87.03,114.014 88.024,113.745 ; KIRI.29@87.095,113.226 88.646,113.792 ; KIRI.29@87.095,114.358 88.646,113.792 ; KIRI.29@87.13,113.233 88.024,113.745 ; KIRI.29@87.13,114.351 88.024,113.839 ; KIRI.29@87.181,113.248 88.024,113.839 ; KIRI.29@87.181,114.336 88.024,113.745 ; KIRI.29@87.402,113.385 cw(c88.383,112.404) 88.383,113.792 cw(c88.383,115.18) KIRI.29@87.402,114.199 ; KIRI2.29@93.375,113.797 cw(c91.987,113.797) 92.968,112.815 cw(c93.95,111.834) KIRI2.29@93.95,113.222 ; KIRI2.29@93.434,114.05 93.256,113.036 ; KIRI2.29@93.459,114.097 93.189,113.103 ; KIRI2.29@93.482,114.13 92.725,112.572 ; KIRI2.29@93.768,113.93 93.256,113.036 ; KIRI2.29@93.964,113.572 95.75,113.797 ; KIRI2.29@93.964,114.022 95.75,113.797 ; KIRI2.29@93.964,113.572 94.979,113.75 ; KIRI2.29@93.964,114.022 94.979,113.844 ; KIRI2.29@93.985,113.575 94.979,113.844 ; KIRI2.29@93.985,114.019 94.979,113.75 ; KIRI2.29@94.042,113.229 95.75,113.797 ; KIRI2.29@94.042,114.365 95.75,113.797 ; KIRI2.29@94.083,113.615 93.189,113.103 ; KIRI2.29@94.085,113.238 94.979,113.75 ; KIRI2.29@94.085,114.356 94.979,113.844 ; KIRI2.29@94.136,113.253 94.979,113.844 ; KIRI2.29@94.136,114.341 94.979,113.75 ; KIRI2.29@94.203,113.281 93.189,113.103 ; KIRI2.29@94.25,113.306 93.256,113.036 ; KIRI2.29@94.283,113.329 92.725,112.572 ; KIRI2.29@94.357,113.39 cw(c95.338,112.409) 95.338,113.797 cw(c95.338,115.185) KIRI2.29@94.357,114.204 ; LCD.7@101.533,114.3 cw(c100.145,114.3) 101.126,113.318 cw(c102.108,112.337) LCD.7@102.108,113.725 ; LCD.7@101.592,114.553 101.414,113.539 ; LCD.7@101.617,114.6 101.347,113.606 ; LCD.7@101.64,114.633 100.883,113.075 ; LCD.7@101.926,114.433 101.414,113.539 ; LCD.7@102.241,114.118 101.347,113.606 ; LCD.7@102.361,113.784 101.347,113.606 ; LCD.7@102.408,113.809 101.414,113.539 ; LCD.7@102.441,113.832 100.883,113.075 ; KIRI.29@86.995,113.792 88.024,113.839 ; KIRI.29@86.995,113.792 88.024,113.745 ; KIRI.29@86.995,113.792 88.646,113.792 ; 88.646,113.792 89.866,112.572 92.725,112.572 ; 92.725,112.572 KIRI2.29@93.95,113.797 ; 92.725,112.572 93.781,113.945 93.189,113.103 ; 92.725,112.572 94.098,113.628 93.256,113.036 ; 92.725,112.572 KIRI2.29@93.95,113.797 ; 93.189,113.103 KIRI2.29@93.95,113.797 ; 93.256,113.036 KIRI2.29@93.95,113.797 ; KIRI2.29@93.95,113.797 94.979,113.844 ; KIRI2.29@93.95,113.797 94.979,113.75 ; KIRI2.29@93.95,113.797 96.388,113.797 97.11,113.075 100.883,113.075 ; 100.883,113.075 LCD.7@102.108,114.3 ; 100.883,113.075 101.939,114.448 101.347,113.606 ; 100.883,113.075 102.256,114.131 101.414,113.539 ; 100.883,113.075 LCD.7@102.108,114.3 ; 101.347,113.606 LCD.7@102.108,114.3 ; 101.414,113.539 LCD.7@102.108,114.3
NetKIRI2_30: KIRI2.30 KIRI.30 LCD.5 | length 100.8
  Top Layer w0.35: KIRI2.30@91.073,113.331 92.685,112.522 ; KIRI2.30@91.11,113.306 92.104,113.036 ; KIRI2.30@91.156,113.281 92.171,113.103 ; KIRI2.30@91.277,113.615 92.171,113.103 ; KIRI2.30@91.41,113.222 cw(c91.41,111.834) 92.392,112.815 cw(c93.373,113.797) KIRI2.30@91.985,113.797 ; KIRI2.30@91.592,113.93 92.104,113.036 ; KIRI2.30@91.876,114.134 92.685,112.522 ; KIRI2.30@91.901,114.097 92.171,113.103 ; KIRI2.30@91.926,114.05 92.104,113.036 ; LCD.5@101.533,111.76 ccw(c100.145,111.76) 101.126,112.742 ccw(c102.108,113.723) LCD.5@102.108,112.335 ; LCD.5@101.592,111.507 101.414,112.521 ; LCD.5@101.617,111.46 101.347,112.454 ; LCD.5@101.643,111.421 100.793,113.075 ; LCD.5@101.926,111.627 101.414,112.521 ; LCD.5@102.241,111.942 101.347,112.454 ; LCD.5@102.361,112.276 101.347,112.454 ; LCD.5@102.408,112.251 101.414,112.521 ; LCD.5@102.447,112.225 100.793,113.075 ; KIRI2.30@91.41,113.797 92.104,113.036 ; KIRI2.30@91.41,113.797 92.171,113.103 ; KIRI2.30@91.41,113.797 92.685,112.522 ; 92.104,113.036 91.261,113.628 92.685,112.522 ; 92.171,113.103 91.579,113.946 92.685,112.522 ; 92.685,112.522 96.266,112.522 96.819,113.075 100.793,113.075 ; 100.793,113.075 LCD.5@102.108,111.76 ; 100.793,113.075 102.257,111.928 101.414,112.521 ; 100.793,113.075 101.94,111.611 101.347,112.454 ; 100.793,113.075 LCD.5@102.108,111.76 ; 101.347,112.454 LCD.5@102.108,111.76 ; 101.414,112.521 LCD.5@102.108,111.76
  Bottom Layer w0.35: KIRI.30@84.122,114.26 85.68,115.017 ; KIRI.30@84.155,114.283 85.149,114.553 ; KIRI.30@84.202,114.308 85.216,114.486 ; KIRI.30@84.322,113.974 85.216,114.486 ; KIRI.30@84.455,114.367 ccw(c84.455,115.755) 85.437,114.774 ccw(c86.418,113.792) KIRI.30@85.03,113.792 ; KIRI.30@84.637,113.659 85.149,114.553 ; KIRI.30@84.923,113.459 85.68,115.017 ; KIRI.30@84.946,113.492 85.216,114.486 ; KIRI.30@84.971,113.539 85.149,114.553 ; KIRI2.30@91.003,113.39 ccw(c90.022,112.409) 90.022,113.797 ccw(c90.022,115.185) KIRI2.30@91.003,114.204 ; KIRI2.30@91.224,113.253 90.381,113.844 ; KIRI2.30@91.224,114.341 90.381,113.75 ; KIRI2.30@91.275,113.238 90.381,113.75 ; KIRI2.30@91.275,114.356 90.381,113.844 ; KIRI2.30@91.3,113.233 89.911,113.797 ; KIRI2.30@91.3,114.361 89.911,113.797 ; KIRI2.30@91.375,113.575 90.381,113.844 ; KIRI2.30@91.375,114.019 90.381,113.75 ; KIRI2.30@91.393,113.573 89.911,113.797 ; KIRI2.30@91.393,114.021 89.911,113.797 ; KIRI2.30@91.396,113.572 90.381,113.75 ; KIRI2.30@91.396,114.022 90.381,113.844 ; KIRI.30@84.455,113.792 85.216,114.486 ; KIRI.30@84.455,113.792 85.149,114.553 ; KIRI.30@84.455,113.792 85.68,115.017 ; 85.149,114.553 84.306,113.961 85.68,115.017 ; 85.216,114.486 84.624,113.643 85.68,115.017 ; 85.68,115.017 88.691,115.017 89.911,113.797 ; 89.911,113.797 KIRI2.30@91.41,113.797 ; 89.911,113.797 KIRI2.30@91.41,113.797 ; 90.381,113.75 KIRI2.30@91.41,113.797 ; 90.381,113.844 KIRI2.30@91.41,113.797
NetKIRI2_31: KIRI2.31 KIRI.31 LCD.9 | length 85.8
  Bottom Layer w0.35: KIRI.31@87.03,116.11 88.024,116.379 ; KIRI.31@87.03,116.554 88.024,116.285 ; KIRI.31@87.087,115.764 88.795,116.332 ; KIRI.31@87.087,116.9 88.795,116.332 ; KIRI.31@87.13,115.773 88.024,116.285 ; KIRI.31@87.13,116.891 88.024,116.379 ; KIRI.31@87.181,115.788 88.024,116.379 ; KIRI.31@87.181,116.876 88.024,116.285 ; KIRI.31@87.402,115.925 cw(c88.383,114.944) 88.383,116.332 cw(c88.383,117.72) KIRI.31@87.402,116.739 ; KIRI2.31@93.375,116.337 cw(c91.987,116.337) 92.968,115.355 cw(c93.95,114.374) KIRI2.31@93.95,115.762 ; KIRI2.31@93.434,116.59 93.256,115.576 ; KIRI2.31@93.459,116.637 93.189,115.643 ; KIRI2.31@93.482,116.67 92.725,115.112 ; KIRI2.31@93.658,115.842 94.762,115.525 ; KIRI2.31@93.768,116.47 93.256,115.576 ; KIRI2.31@93.807,116.163 94.762,115.525 ; KIRI2.31@94.032,115.768 cw(c94.155,114.918) 94.762,115.525 ; KIRI2.31@94.083,116.155 93.189,115.643 ; KIRI2.31@94.124,116.48 94.762,115.525 ; KIRI2.31@94.203,115.821 93.189,115.643 ; KIRI2.31@94.25,115.846 93.256,115.576 ; KIRI2.31@94.283,115.869 92.725,115.112 ; KIRI2.31@94.445,116.629 94.762,115.525 ; KIRI2.31@94.519,116.255 ccw(c95.369,116.132) 94.762,115.525 ; LCD.9@101.533,116.84 cw(c100.145,116.84) 101.126,115.858 cw(c102.108,114.877) LCD.9@102.108,116.265 ; LCD.9@101.592,117.093 101.414,116.079 ; LCD.9@101.617,117.14 101.347,116.146 ; LCD.9@101.643,117.179 100.793,115.525 ; LCD.9@101.926,116.973 101.414,116.079 ; LCD.9@102.241,116.658 101.347,116.146 ; LCD.9@102.361,116.324 101.347,116.146 ; LCD.9@102.408,116.349 101.414,116.079 ; LCD.9@102.447,116.375 100.793,115.525 ; KIRI.31@86.995,116.332 88.024,116.285 ; KIRI.31@86.995,116.332 88.024,116.379 ; KIRI.31@86.995,116.332 88.87,116.332 90.09,115.112 92.725,115.112 ; 88.024,116.285 87.009,116.107 88.795,116.332 ; 88.024,116.379 87.009,116.557 88.795,116.332 ; 92.725,115.112 KIRI2.31@93.95,116.337 ; 92.725,115.112 93.781,116.485 93.189,115.643 ; 92.725,115.112 94.098,116.168 93.256,115.576 ; 92.725,115.112 KIRI2.31@93.95,116.337 ; 93.189,115.643 KIRI2.31@93.95,116.337 ; 93.256,115.576 KIRI2.31@93.95,116.337 ; KIRI2.31@93.95,116.337 94.762,115.525 ; 94.762,115.525 100.793,115.525 ; 100.793,115.525 LCD.9@102.108,116.84 ; 100.793,115.525 101.94,116.989 101.347,116.146 ; 100.793,115.525 102.257,116.672 101.414,116.079 ; 100.793,115.525 LCD.9@102.108,116.84 ; 101.347,116.146 LCD.9@102.108,116.84 ; 101.414,116.079 LCD.9@102.108,116.84
NetKIRI2_32: KIRI2.32 KIRI.32 LCD.8 | length 93
  Top Layer w0.35: KIRI2.32@91.071,115.872 92.725,115.022 ; KIRI2.32@91.11,115.846 92.104,115.576 ; KIRI2.32@91.156,115.821 92.171,115.643 ; KIRI2.32@91.277,116.155 92.171,115.643 ; KIRI2.32@91.41,115.762 cw(c91.41,114.374) 92.392,115.355 cw(c93.373,116.337) KIRI2.32@91.985,116.337 ; KIRI2.32@91.592,116.47 92.104,115.576 ; KIRI2.32@91.875,116.676 92.725,115.022 ; KIRI2.32@91.901,116.637 92.171,115.643 ; KIRI2.32@91.926,116.59 92.104,115.576 ; LCD.8@99.161,113.893 ccw(c98.18,112.912) 98.18,114.3 ccw(c98.18,115.688) LCD.8@99.161,114.707 ; LCD.8@99.382,113.756 98.539,114.347 ; LCD.8@99.382,114.844 98.539,114.253 ; LCD.8@99.433,113.741 98.539,114.253 ; LCD.8@99.433,114.859 98.539,114.347 ; LCD.8@99.476,113.732 97.768,114.3 ; LCD.8@99.476,114.868 97.768,114.3 ; LCD.8@99.533,114.078 98.539,114.347 ; LCD.8@99.533,114.522 98.539,114.253 ; KIRI2.32@91.41,116.337 92.104,115.576 ; KIRI2.32@91.41,116.337 92.171,115.643 ; KIRI2.32@91.41,116.337 92.725,115.022 ; 92.104,115.576 91.261,116.168 92.725,115.022 ; 92.171,115.643 91.579,116.486 92.725,115.022 ; 92.725,115.022 95.798,115.022 96.52,114.3 LCD.8@99.568,114.3 ; 97.768,114.3 99.554,114.525 98.539,114.347 ; 97.768,114.3 99.554,114.075 98.539,114.253 ; 98.539,114.253 LCD.8@99.568,114.3 ; 98.539,114.347 LCD.8@99.568,114.3
  Bottom Layer w0.35: KIRI.32@84.122,116.8 85.68,117.557 ; KIRI.32@84.155,116.823 85.149,117.093 ; KIRI.32@84.202,116.848 85.216,117.026 ; KIRI.32@84.322,116.514 85.216,117.026 ; KIRI.32@84.455,116.907 ccw(c84.455,118.295) 85.437,117.314 ccw(c86.418,116.332) KIRI.32@85.03,116.332 ; KIRI.32@84.637,116.199 85.149,117.093 ; KIRI.32@84.923,115.999 85.68,117.557 ; KIRI.32@84.946,116.032 85.216,117.026 ; KIRI.32@84.971,116.079 85.149,117.093 ; KIRI2.32@90.972,115.964 ccw(c90.165,115.277) 90.165,116.337 ; KIRI2.32@90.972,116.71 cw(c90.165,117.397) 90.165,116.337 ; KIRI2.32@91.188,115.807 90.52,116.398 ; KIRI2.32@91.188,116.867 90.52,116.276 ; KIRI2.32@91.262,115.781 90.52,116.276 ; KIRI2.32@91.262,116.893 90.52,116.398 ; KIRI2.32@91.277,115.778 90.165,116.337 ; KIRI2.32@91.277,116.896 90.165,116.337 ; KIRI2.32@91.366,116.116 90.52,116.398 ; KIRI2.32@91.366,116.558 90.52,116.276 ; KIRI2.32@91.39,116.113 90.165,116.337 ; KIRI2.32@91.39,116.561 90.165,116.337 ; KIRI2.32@91.397,116.112 90.52,116.276 ; KIRI2.32@91.397,116.562 90.52,116.398 ; KIRI.32@84.455,116.332 85.149,117.093 ; KIRI.32@84.455,116.332 85.216,117.026 ; KIRI.32@84.455,116.332 85.68,117.557 ; 85.149,117.093 84.306,116.501 85.68,117.557 ; 85.216,117.026 84.624,116.183 85.68,117.557 ; 85.68,117.557 88.945,117.557 90.165,116.337 ; 90.165,116.337 KIRI2.32@91.41,116.337 ; 90.165,116.337 KIRI2.32@91.41,116.337 ; 90.52,116.276 KIRI2.32@91.41,116.337 ; 90.52,116.398 KIRI2.32@91.41,116.337
NetKIRI2_34: KIRI2.34 KIRI.34 LCD.10 | length 80.5
  Top Layer w0.35: KIRI2.34@91.096,118.396 92.837,117.602 ; KIRI2.34@91.133,118.373 92.288,118.067 ; KIRI2.34@91.27,118.701 92.837,117.602 ; KIRI2.34@91.274,118.698 92.288,118.067 ; KIRI2.34@91.41,118.302 cw(c91.41,116.547) 92.651,117.788 ; KIRI2.34@91.41,118.652 cw(c91.41,117.742) 92.054,118.385 ; KIRI2.34@91.569,119.036 92.837,117.602 ; KIRI2.34@91.577,119.027 92.288,118.067 ; KIRI2.34@91.853,119.243 92.837,117.602 ; KIRI2.34@91.89,119.193 92.288,118.067 ; KIRI2.34@91.985,118.877 ccw(c93.006,118.877) 92.284,118.155 ; LCD.10@99.004,116.951 ccw(c98.295,117.091) 98.806,117.602 ; LCD.10@99.068,116.557 98.806,117.602 ; LCD.10@99.393,116.698 98.806,117.602 ; LCD.10@99.457,117.404 cw(c99.317,118.113) 98.806,117.602 ; LCD.10@99.568,116.84 98.806,117.602 ; LCD.10@99.71,117.015 98.806,117.602 ; LCD.10@99.851,117.34 98.806,117.602 ; KIRI2.34@91.41,118.877 92.288,118.067 ; KIRI2.34@91.41,118.877 92.837,117.602 ; KIRI2.34@91.41,118.877 91.562,118.877 92.837,117.602 ; 92.837,117.602 98.806,117.602
  Bottom Layer w0.35: KIRI.34@84.122,119.34 85.68,120.097 ; KIRI.34@84.155,119.363 85.149,119.633 ; KIRI.34@84.202,119.388 85.216,119.566 ; KIRI.34@84.322,119.054 85.216,119.566 ; KIRI.34@84.455,119.447 ccw(c84.455,120.835) 85.437,119.854 ccw(c86.418,118.872) KIRI.34@85.03,118.872 ; KIRI.34@84.637,118.739 85.149,119.633 ; KIRI.34@84.923,118.539 85.68,120.097 ; KIRI.34@84.946,118.572 85.216,119.566 ; KIRI.34@84.971,118.619 85.149,119.633 ; KIRI2.34@91.003,118.47 ccw(c90.022,117.489) 90.022,118.877 ccw(c90.022,120.265) KIRI2.34@91.003,119.284 ; KIRI2.34@91.224,118.333 90.381,118.924 ; KIRI2.34@91.224,119.421 90.381,118.83 ; KIRI2.34@91.275,118.318 90.381,118.83 ; KIRI2.34@91.275,119.436 90.381,118.924 ; KIRI2.34@91.3,118.313 89.911,118.877 ; KIRI2.34@91.3,119.441 89.911,118.877 ; KIRI2.34@91.375,118.655 90.381,118.924 ; KIRI2.34@91.375,119.099 90.381,118.83 ; KIRI2.34@91.393,118.653 89.911,118.877 ; KIRI2.34@91.393,119.101 89.911,118.877 ; KIRI2.34@91.396,118.652 90.381,118.83 ; KIRI2.34@91.396,119.102 90.381,118.924 ; KIRI.34@84.455,118.872 85.149,119.633 ; KIRI.34@84.455,118.872 85.216,119.566 ; KIRI.34@84.455,118.872 85.68,120.097 ; 85.149,119.633 84.306,119.041 85.68,120.097 ; 85.216,119.566 84.624,118.723 85.68,120.097 ; 85.68,120.097 88.691,120.097 89.911,118.877 ; 89.911,118.877 KIRI2.34@91.41,118.877 ; 89.911,118.877 KIRI2.34@91.41,118.877 ; 90.381,118.83 KIRI2.34@91.41,118.877 ; 90.381,118.924 KIRI2.34@91.41,118.877